# Altium PCB PCB2.PcbDoc
Units mm, origin at the board's own origin, x right, y up, seen from the top; angles counter-clockwise.
Board outline 88.72 x 68.2 mm, 2 copper layers (Top Layer, Bottom Layer); 41 components, 48 nets, 206 pads, 106 vias.
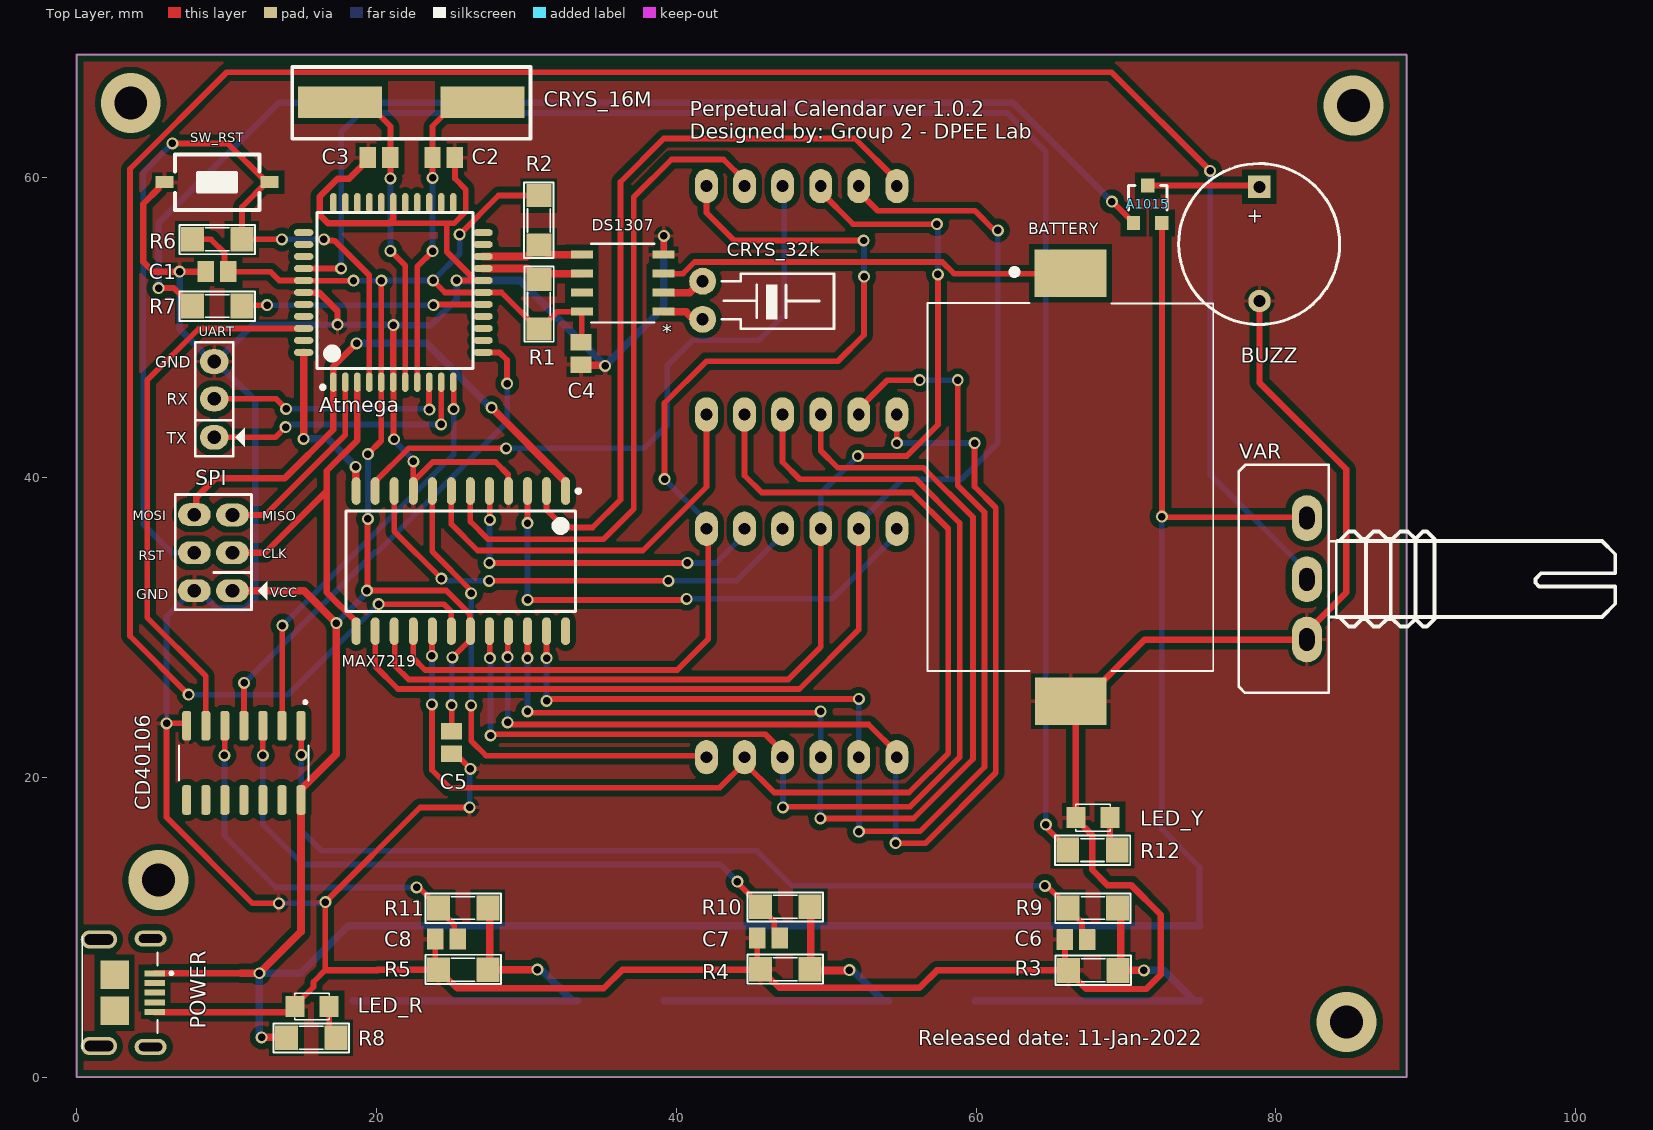
[diagram p0: Top Layer view]
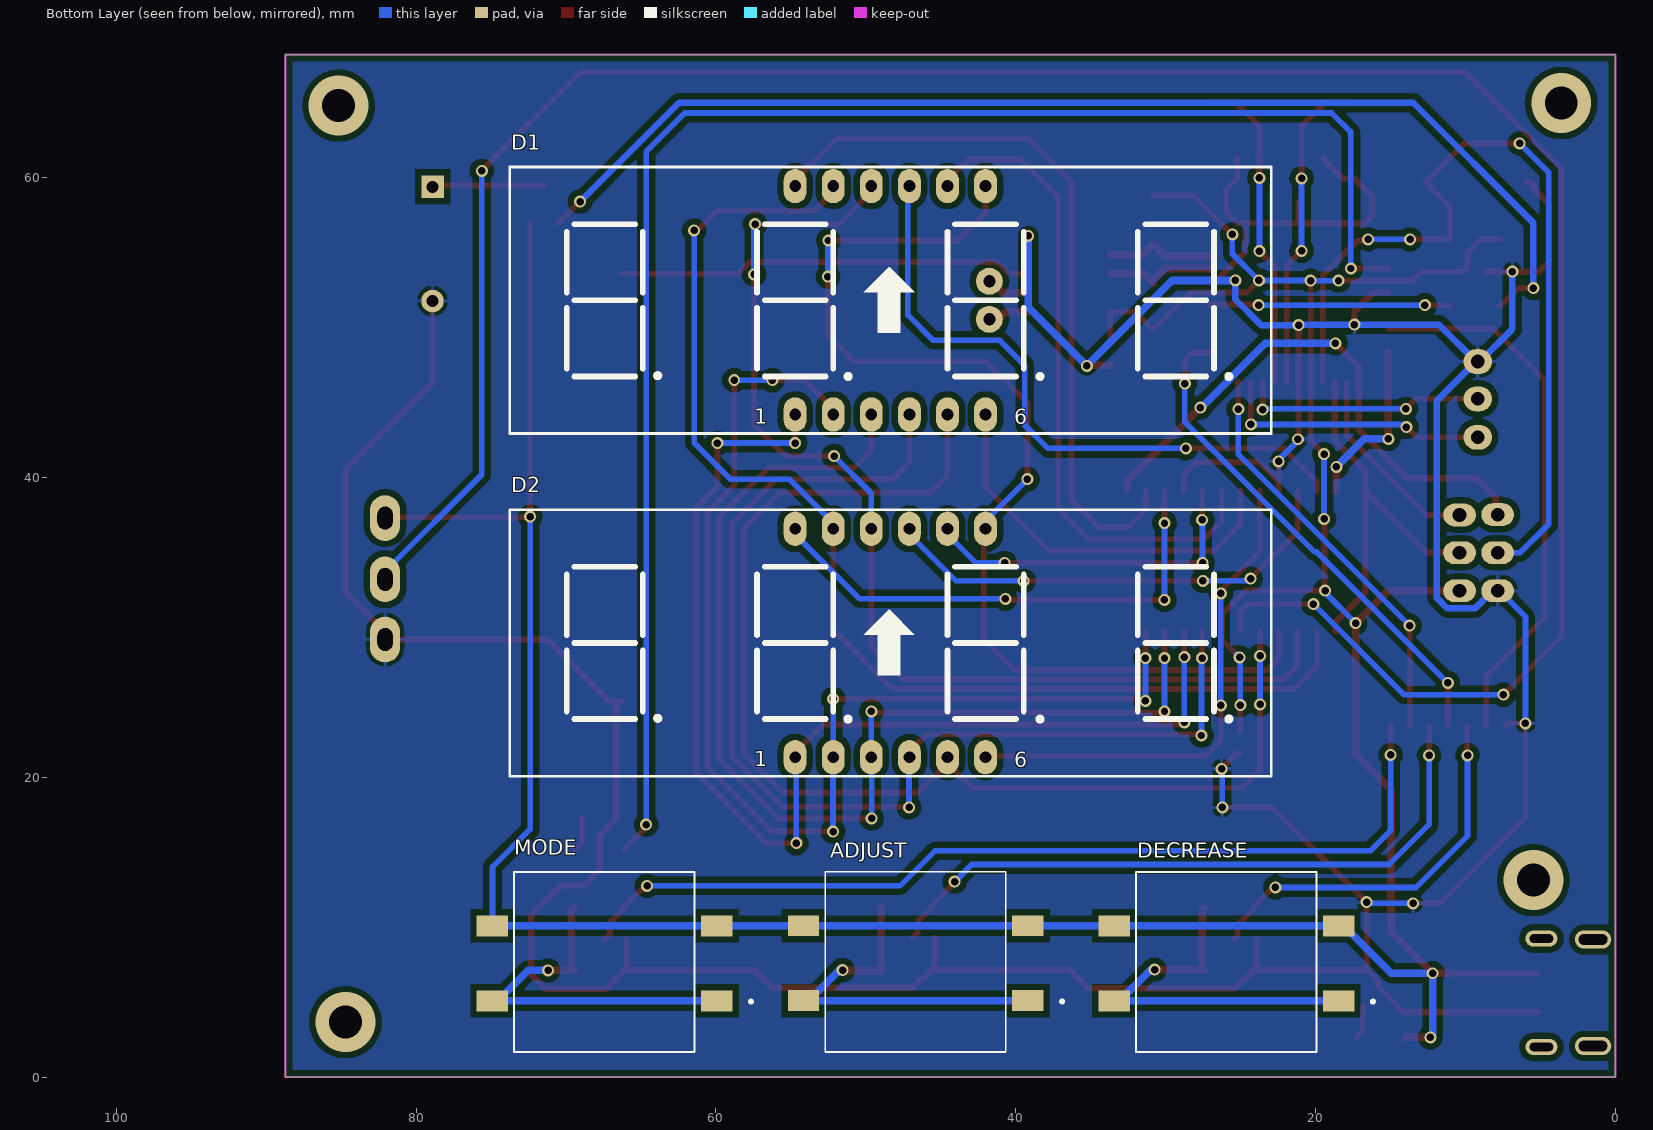
[diagram p1: Bottom Layer view, seen from below]

## Layer stack, top to bottom
Top Solder: solder mask 0.0102, Solder Resist, Dk 3.5
Top Layer: signal copper 0.0356
Dielectric 1: dielectric 0.32, FR-4, Dk 4.8
Bottom Layer: signal copper 0.0356
Bottom Solder: solder mask 0.0102, Solder Resist, Dk 3.5

## Board outline
0,0 0,68.199 88.722,68.199 88.722,0

## Design rules (kind name [scope] priority, off if disabled: settings)
Clearance Clearance_poly [InPolygon] p1: gap=0.406 ignorepadtopadclearanceinfootprint=FALSE
Clearance [All] p2: gap=0.2 ignorepadtopadclearanceinfootprint=FALSE
PolygonConnect [All] p1: connectstyle=Relief reliefconductorwidth=0.254 reliefentries=4 polygonreliefangle="90 Angle" airgapwidth=0.254
RoutingVias [All] p1: holewidth=0.5 width=0.8 viastyle="Through Hole" minholewidth=0.4 minwidth=0.8 maxholewidth=0.6 maxwidth=0.8
SolderMaskExpansion [All] p1: expansion=0.102 istentingtop=FALSE
Width [All] p1: maxlimit=1.016 minlimit=0.254 preferedwidth=0.508
30 further rules are at their usual default settings.

## Components (designator, comment, footprint, x,y, rotation, side; value= is the part's Value field where it differs from the comment)
A1015 "SA1015" SOT23-321 71.45,58.217 r0 top value=A1015 (schematic designator Q1)
ADJUST "Adjust" SW_1571527-1 46.66,7.468 r0 bottom (schematic designator SW2)
Atmega "ATmega32A-AU" TQFP44 21.12,52.336 r90 top (schematic designator U2)
BATTERY "796136-1" TE_796136-1 66.294,39.751 r270 top (schematic designator BAT)
BUZZ "Buzzer" SPEAKER 78.892,59.385 r270 top
C1 "0.1uF" C0805 9.373,53.721 r0 top value=33p
C2 "22pF" C0805 24.486,61.341 r0 top value=33p
C3 "22pF" C0805 20.18,61.341 r180 top value=33p
C4 "0.1uF" C0805 33.63,48.26 r90 top value=33p
C5 "0.1uF" C0805 25.019,22.327 r90 top value=33p
C6 "0.1uF" C0805 66.675,9.169 r0 top value=33p
C7 "0.1uF" C0805 46.152,9.271 r0 top value=33p
C8 "0.1uF" C0805 24.663,9.195 r0 top value=33p
CD40106 "CD40106BM" SOIC127P600X175-14N 11.151,20.955 r270 top
CRYS_16M "16MHz" ABLS2-8.000MHZ-D4Y-T 22.327,65.024 r0 top value=8MHz (schematic designator CRYS_16)
CRYS_32k "32.768Khz" XT32k 41.758,53.086 r0 top value=4Mhz (schematic designator CRYS_32)
D1 "Above" 7SEGQ 54.712,44.196 r180 bottom value="LED 7Q SEG"
D2 "Below" 7SEGQ 54.712,21.336 r180 bottom value="LED 7Q SEG"
DECREASE "Increase" SW_1571527-1 25.93,7.457 r0 bottom (schematic designator SW3)
DS1307 "ds1307zn+" 21-0041B_8_MXM 36.424,52.959 r180 top (schematic designator U3)
LED_R "LED SMD" SM-LED-0805-Red 16.84,4.699 r180 top
LED_Y "LED SMD" SM-LED-0805-Red 68.936,17.297 r180 top
MAX7219 "MAX7219ENG" SO24 25.629,34.417 r270 top (schematic designator U4)
MODE "Mode" SW_1571527-1 67.412,7.457 r0 bottom (schematic designator SW1)
POWER "2040002-1" TE_2040002-1 2.528,5.622 r270 top (schematic designator J)
R1 "4k7" SM-RES-1206 30.836,53.213 r270 top value="R1/4W - 1K"
R2 "4k7" SM-RES-1206 30.836,55.499 r90 top value="R1/4W - 1K"
R3 "1k" SM-RES-1206 66.167,7.112 r0 top value="R1/4W - 1K"
R4 "1k" SM-RES-1206 45.618,7.188 r0 top value="R1/4W - 1K"
R5 "1k" SM-RES-1206 24.13,7.163 r0 top value="R1/4W - 1K"
R6 "1k" SM-RES-1206 11.024,55.88 r180 top value="R1/4W - 1K"
R7 "1k" SM-RES-1206 11.024,51.435 r180 top value="R1/4W - 1K"
R8 "1K" SM-RES-1206 17.297,2.616 r180 top value="R1/4W - 1K"
R9 "10K" SM-RES-1206 69.444,11.278 r180 top value="R1/4W - 1K"
R10 "10K" SM-RES-1206 48.92,11.354 r180 top value="R1/4W - 1K"
R11 "10K" SM-RES-1206 27.432,11.278 r180 top value="R1/4W - 1K"
R12 "330" SM-RES-1206 69.418,15.138 r180 top value="R1/4W - 1K"
SPI "Connector 3x2" JP3x2 9.119,34.976 r90 top
SW_RST "RST" SW1-SMD 9.373,59.69 r0 top value="SW chip 2 pin"
UART "Jumper 3" JP3 9.169,45.212 r90 top value=J3
VAR "10K" VR-S1 82.067,33.223 r90 top value="Volume 50k"

## Footprints (in the part's own frame and the unit in brackets; to place one, negate y for a bottom-side part, rotate by r counter-clockwise, add the part's x,y. Pads: shape width x height; smd on the part's side, far side on the other; paste and mask are expansions set on the pad)
7SEGQ [mil] "DIP 12 Leads; Body 48 x 20 mm; Pitch 0.5 mm"
  oval 60x90 hole 31: 1(0,0) 2(100,0) 3(200,0) 4(300,0) 5(400,0) 6(500,0) 7(500,600) 8(400,600) 9(300,600) 10(200,600) 11(100,600) 12(0,600)
  silkscreen extent -750,-50 1250,650, body extent -720,-80 1260,668, height 565
21-0041B_8_MXM [mil]
  rect 57.5x21 smd paste+0 mask+0: 1(-107.25,75) 2(-107.25,25) 3(-107.25,-25) 4(-107.25,-75) 5(107.25,-75) 6(107.25,-25) 7(107.25,25) 8(107.25,75)
  silkscreen extent -84,-104 84,104, body extent -122,-99 122,99, height 69
ABLS2-8.000MHZ-D4Y-T [mm]
  rect 5.6x2.1 smd: 1(-4.75,0) 2(4.75,0)
  silkscreen extent -7.95,-2.44 7.95,2.36
C0805 [mm] "Chip Capacitor, Body 2.0x1.3mm, IPC High Density"
  rect 1.1x1.4 smd: 1(-0.75,0) 2(0.75,0)
  body extent -1.1,-0.72 1.1,0.72, height 1.4
JP3 [mil] "Jumper 3"
  oval 65x75 hole 36: 1(-100,0) 2(1,0) 3(99,0)
  silkscreen extent -150,-81 150,50, body extent -150,-60 150,55, height 355
JP3x2 [mil] "Connector 3x2"
  oval 60x86 hole 36: 1(-100,-50) 2(0,-50) 3(99,-50) 4(-100,50) 5(0,50) 6(100,50)
  silkscreen extent -150,-141 153,100, body extent -150,-100 150,100, height 335
SM-LED-0805-Red [mil]
  rect 50x55 smd: 1(0,0) 2(90,0)
  silkscreen extent 0,-35 90,35, body extent 5,-25 85,25, height 43
SM-RES-1206 [mil]
  rect 60x65 smd: 1(0,0) 2(130,0)
  silkscreen extent -34,-38 164,39, body extent 2,-31 128,32, height 40
SO24 [mm] "SOIC, 24-Leads, Body 15.30x7.50mm, Pitch 1.27mm, IPC Medium Density"
  oval 1.85x0.6 smd: 1(-4.675,6.985) 2(-4.675,5.715) 3(-4.675,4.445) 4(-4.675,3.175) 5(-4.675,1.905) 6(-4.675,0.635) 7(-4.675,-0.635) 8(-4.675,-1.905) 9(-4.675,-3.175) 10(-4.675,-4.445) 11(-4.675,-5.715) 12(-4.675,-6.985) 13(4.675,-6.985) 14(4.675,-5.715) 15(4.675,-4.445) 16(4.675,-3.175) 17(4.675,-1.905) 18(4.675,-0.635) 19(4.675,0.635) 20(4.675,1.905) 21(4.675,3.175) 22(4.675,4.445) 23(4.675,5.715) 24(4.675,6.985)
  silkscreen extent -4.8,-7.65 3.35,7.96, body extent -5.2,-7.83 5.2,7.57, height 2.6
SOIC127P600X175-14N [mm]
  rrect50% 1.97x0.6 smd: 1(-2.475,3.81) 2(-2.475,2.54) 3(-2.475,1.27) 4(-2.475,0) 5(-2.475,-1.27) 6(-2.475,-2.54) 7(-2.475,-3.81) 8(2.475,-3.81) 9(2.475,-2.54) 10(2.475,-1.27) 11(2.475,0) 12(2.475,1.27) 13(2.475,2.54) 14(2.475,3.81)
  silkscreen extent -4.15,-4.33 1.17,4.33
SOT23-321 [mm]
  rect 0.9x0.95 smd mask+0: 1(0.95,-1.25)
  rect 0.9x0.95 smd: 2(0,1.25) 3(-0.95,-1.25)
  silkscreen extent -1.3,-0.38 1.3,1.25, body extent -1.52,-1.23 1.48,1.27, height 1.06
SPEAKER [mm]
  rect 1.5x1.5 hole 0.8: 1(0,0)
  round 1.5 hole 0.8: 2(7.62,0.013)
  silkscreen extent -1.55,-5.38 9.18,5.36, body extent -2.22,-6 13.24,6, height 3.5
SW1-SMD [mm]
  rect 1.2x0.8 smd: 1(-3.5,0) 2(3.5,0)
  silkscreen extent -2.82,-1.85 2.82,1.85, body extent -3.05,-1.85 3.05,1.85, height 2.5
SW_1571527-1 [mm]
  rect 2.1x1.4 smd: 1(-7.468,2.377) 2(7.496,2.377) 3(-7.468,-2.623) 4(7.496,-2.623)
  silkscreen extent -9.85,-6.22 6.05,5.79
TE_796136-1 [mm]
  rect 3.15x4.78 smd: 1(-13.868,0) 2(14.681,0.025)
  silkscreen extent -14.16,-9.53 12.67,9.53
TE_2040002-1 [mm]
  rect 0.4x1.35 smd: 1(-1.3,2.675) 2(-0.65,2.675) 3(0,2.675) 4(0.65,2.675) 5(1.3,2.675)
  rect 1.9x1.9 smd: S4(-1.2,0) S5(1.2,0)
  oval 1.068x2.136 hole 0.56 slot 1.56 at 90 deg: SH1(-3.615,2.4) SH2(3.615,2.4)
  oval 1.218x2.436 hole 0.71 slot 1.91 at 90 deg: SH3(3.556,-1.041)
  oval 1.218x2.436 hole 0.71 slot 1.92 at 90 deg: SH4(-3.556,-1.041)
  silkscreen extent -3.77,-2.16 3.73,3.89
TQFP44 [mm] "TQFP, 44-Leads, Body 10X10mm, Pitch 0.80mm, IPC High Density"
  oval 1.3x0.45 smd: 1(-5.981,4) 2(-5.981,3.2) 3(-5.981,2.4) 4(-5.981,1.6) 5(-5.981,0.8) 6(-5.981,0) 7(-5.981,-0.8) 8(-5.981,-1.6) 9(-5.981,-2.4) 10(-5.981,-3.2) 11(-5.981,-4) 23(5.981,-4) 24(5.981,-3.2) 25(5.981,-2.4) 26(5.981,-1.6) 27(5.981,-0.8) 28(5.981,0) 29(5.981,0.8) 30(5.981,1.6) 31(5.981,2.4) 32(5.981,3.2) 33(5.981,4)
  oval 0.45x1.3 smd: 12(-4,-5.981) 13(-3.2,-5.981) 14(-2.4,-5.981) 15(-1.6,-5.981) 16(-0.8,-5.981) 17(0,-5.981) 18(0.8,-5.981) 19(1.6,-5.981) 20(2.4,-5.981) 21(3.2,-5.981) 22(4,-5.981) 34(4,5.981) 35(3.2,5.981) 36(2.4,5.981) 37(1.6,5.981) 38(0.8,5.981) 39(0,5.981) 40(-0.8,5.981) 41(-1.6,5.981) 42(-2.4,5.981) 43(-3.2,5.981) 44(-4,5.981)
  silkscreen extent -6.45,-5.33 5.33,5.07, body extent -5.99,-5.96 6.01,6.04, height 1.05
VR-S1 [mil]
  oval 120x78.74 hole 40 slot 60 at 0 deg: 1(-159,0) 2(-1,0) 3(160,0)
  silkscreen extent -299,-810 300,179, body extent -310,-818 310,188, height 840
XT32k [mm]
  round 1.8 hole 0.813: 1(0,0) 2(0,-2.54)
  silkscreen extent 1.27,-3.17 8.76,0.51, body extent -0.15,-2.42 8.2,-0.12, height 1.95

## Part data
A1015: library part 2SA1015, "PNP 600mW, ECB"
ADJUST DECREASE MODE: library part 1571527-1, "Switch Tactile OFF _ON_ Round Button Gull Wing 0.05A 12VDC 0.98N SMD Bulk", Package="SMD-6 Omron Electronics", Availability=Unavailable, EU_RoHS_Compliance=Compliant, MF="TE Connectivity", MP=1571527-1, Price=None, SnapEDA_Link=https://www.snapeda.com/parts/1571527-1/TE%20Connectivity/view-part/244428/?ref=snap, TE_purchase_URL=https://www.te.com/usa-en/product-1571527-1.html?te_bu=Cor&te_type=disp&te_campaign=seda_glo_cor-seda-global-disp-prtnr-fy19-seda-model-bom-cta_sma-317_1&elqCampaignId=32493
Atmega: "8/16-bit AVR XMEGA A4 Microcontroller, 1.6-3.6V, 32KB + 4KB Flash, 1KB EEPROM, 4KB SRAM, 44-pin TQFP, Industrial Grade (-40°C to 85°C), Pb-Free", Supplier Part Number 1=ATXMEGA32A4-AU-ND, ComponentLink1Description="Manufacturer Link", ComponentLink1URL=http://www.atmel.com/products/avr/default.asp?, ComponentLink2Description="ATxmega16A4/32A4/64A4/128A4 Datasheet", ComponentLink2URL=http://www.atmel.com/dyn/resources/prod_documents/doc8069.pdf, ComponentLink3Description="Atmel.com Home", ComponentLink3URL=http://www.atmel.com, DatasheetVersion="revN, Feb-2010", PackageDescription="44-Pin Plastic Thin Profile Quad Flat Pack, 10 x 10 x 1.0 mm Body, 0.8 mm Pitch (TQFP)", PackageReference=44A, PackageVersion="rev.B, Oct-2001", Published=1-Apr-2010, Publisher="Altium Limited", Supplier 1=Digi-Key, Supplier 2=Farnell, Supplier 3=Mouser, Supplier Part Number 2=1748557, Supplier Part Number 3=556-ATXMEGA32A4-AU
BATTERY: "BATTERY HOLDER; No. of Batteries:1; Terminal Type:Surface Mount; For Use With:CR2032 Batteries; Accessory Type:Battery Holder; Battery Size Code:2032", Package=None, Availability=Unavailable, EU_RoHS_Compliance=Compliant, MF="TE Connectivity", MP=796136-1, Number_of_Positions=2, Price=None, SnapEDA_Link=https://www.snapeda.com/parts/796136-1/TE%20Connectivity%20AMP%20Connectors/view-part/761452/?ref=snap, TE_purchase_URL=https://www.te.com/usa-en/product-796136-1.html?te_bu=Cor&te_type=disp&te_campaign=seda_glo_cor-seda-global-disp-prtnr-fy19-seda-model-bom-cta_sma-317_1&elqCampaignId=32493
C1 C2 C3 C4 C5 C6 C7 C8: library part CapSMD, "Capacitor", LatestRevisionDate=17-Jul-2002, LatestRevisionNote="Re-released for DXP Platform.", PackageReference=RAD-0.3, Published=8-Jun-2000, Publisher="Altium Limited"
CD40106: "CMOS Hex Schmitt Triggers 14-SOIC -55 to 125", Package="SOIC-14 Texas Instruments", Availability=Unavailable, DigiKey-Purchase-URL=https://snapeda.com/shop?store=DigiKey&id=321259, MF="Texas Instruments", Mouser-Purchase-URL=https://snapeda.com/shop?store=Mouser&id=321259, MP=CD40106BM, Price=None, SnapEDA_Link=https://www.snapeda.com/parts/CD40106BM/Texas%20Instruments/view-part/321259/?ref=snap, Texas_Instruments-Purchase-URL=https://snapeda.com/shop?store=Texas+Instruments&id=321259
CRYS_16M: library part ABLS2-8.000MHZ-D4Y-T, "Crystal, 8 MHz, SMD, 11.4mm x 4.7mm, 30 ppm, 18 pF, 30 ppm, ABLS2 Series", Manufacturer=ABRACON, Component Type=Crystal, Manufacturer Part No=ABLS2-8.000MHZ-D4Y-T
CRYS_32k: library part XT2, "Crystal, 32.768 KHz, -40 to 85 degC, 3.2 x 1.5 x 0.9 mm SMD"
D1 D2: library part LED7Q, "Four 7 Seg Dipslay"
DS1307: "No Description Available", Mfr_Name="Maxim Integrated Products", Copyright="Copyright (C) 2021 Ultra Librarian. All rights reserved.", Manufacturer_Part_Number=ds1307zn+, RefDes=RefDes, Type=DEV
LED_R LED_Y: library part LED-SMD-0805
MAX7219: "Serially Interfaced, 8-Digit LED Display Driver", Code_JEDEC=MS-001-AF, ComponentLink1Description="Manufacturer Link", ComponentLink1URL=http://www.maxim-ic.com/, ComponentLink2Description=Datasheet, ComponentLink2URL=http://pdfserv.maxim-ic.com/en/ds/MAX7219-MAX7221.pdf, DatasheetVersion=Jul-1997, LatestRevisionDate=29-May-2009, LatestRevisionNote="Component Body Added.", PackageDescription="DIP, 24-Pin, Row Spacing 7.62 mm, Pitch 2.54 mm", PackageReference=NG24A, PackageVersion=1997, Published=16-Jan-2001, Publisher="Altium Limited"
POWER: "Conn Micro USB 2.0 Type B RCP 5 POS 0.65mm Solder RA SMD 5 Terminal 1 Port T/R", Package=None, Availability=Unavailable, Centerline_Pitch=".65 mm[.025 in]", MF="TE Connectivity", MP=2040002-1, Number_of_Positions=5, Price=None, Product_Type=Connector, SnapEDA_Link=https://www.snapeda.com/parts/2040002-1/TE%20Connectivity%20AMP%20Connectors/view-part/782025/?ref=snap, TE_purchase_URL=https://www.te.com/usa-en/product-2040002-1.html?te_bu=Cor&te_type=disp&te_campaign=seda_glo_cor-seda-global-disp-prtnr-fy19-seda-model-bom-cta_sma-317_1&elqCampaignId=32493
R1 R2 R3 R4 R5 R6 R9 R10 R11: library part R, "Resistor 1/4W"
R7 R8 R12: library part R, "Resistor for buzzer"
SPI: library part JP3x2
SW_RST: library part SW2, "Switch button 2 pin"
UART: library part JP3
VAR: library part VR-S, "Var Resistor"

## Via types
v1: diameter 0.8, hole 0.5, Top Layer to Bottom Layer, 56 vias
v2: diameter 0.8/0.8 (per signal layer), hole 0.5, Top Layer to Bottom Layer, 46 vias
v3: diameter 4/4 (per signal layer), hole 2.2, Top Layer to Bottom Layer, 4 vias

## Nets (pads, with @x,y where several pads share a name; then routed paths per layer and width w, separated by ;. In a path a pad name is that pad's centre, name@x,y a point inside that pad or via, vN(x,y) a via of type N, cw(c..) or ccw(c..) an arc to the next point about the centre after c; other vN are vias at no path point)
Adjust: Atmega.12 CD40106.4 | length 33.6
  Top Layer w0.381: CD40106.4 11.163,23.443 11.163,26.279 v1(11.176,26.292) ; Atmega.12 28.194,48.336 28.702,47.828 28.702,46.279 v1(28.721,46.26)
  Bottom Layer w0.381: v1(11.176,26.292) 19.917,35.033 20.06,35.033 28.721,43.694 v1(28.721,46.26)
Buzzer: Atmega.16 R7.1 | length 16.1
  Top Layer w0.381: R7.1 11.074,51.486 v1(12.7,51.486) ; v1(23.8,51.486) 23.85,51.536 Atmega.16@27.1,51.536
  Bottom Layer w0.381: v1(12.7,51.486) v1(23.8,51.486)
CLK: Atmega.3 MAX7219.13 SPI.2 | length 26.3
  Top Layer w0.432: SPI.2 12.573,34.976 16.688,39.091 ; MAX7219.13 18.644,30.367 16.688,32.323 16.688,39.091 ; Atmega.3 18.72,42.469 16.688,40.437 16.688,40.157 16.688,39.091
Dig0: D1.12 MAX7219.2 | length 49.8
  Top Layer w0.381: MAX7219.2 31.344,37.846 32.537,36.652 34.417,36.652 36.271,38.506 36.271,59.715 39.167,62.611 51.918,62.611 54.712,59.817 D1.12
Dig1: D1.9 MAX7219.11 | length 43.5
  Top Layer w0.381: MAX7219.11 19.914,39.717 22.132,41.935 v1(28.651,41.935)
  Bottom Layer w0.381: v1(28.651,41.935) 37.846,41.935 39.395,43.485 39.395,47.473 41.072,49.149 45.517,49.149 47.193,50.825 47.193,59.334 D1.9
Dig2: D1.8 MAX7219.6 | length 44.5
  Top Layer w0.381: MAX7219.6 26.264,37.059 27.457,35.865 35.128,35.865 37.163,37.9 37.163,58.703 39.675,61.214 43.155,61.214 44.552,59.817 D1.8
Dig3: D1.6 MAX7219.7 | length 26.5
  Top Layer w0.381: MAX7219.7 24.994,36.881 26.746,35.128 37.77,35.128 42.012,39.37 D1.6
Dig4: D2.12 MAX7219.3 | length 34.1
  Top Layer w0.381: v2(30.074,31.826) 40.615,31.826 v2(40.691,31.902) ; v2(30.074,36.957) MAX7219.3
  Bottom Layer w0.381: v2(30.074,31.826) v2(30.074,36.957) ; v2(40.691,31.902) 50.419,31.902 54.712,36.195 D2.12
Dig5: D2.9 MAX7219.10 | length 31.7
  Top Layer w0.381: MAX7219.10 21.184,36.398 v2(24.333,33.249) ; v2(27.508,33.096) v2(39.472,33.096) ; D2.9@47.073,36.557 D2.9
  Bottom Layer w0.381: v2(24.333,33.249) 24.484,33.098 27.507,33.098 v2(27.508,33.096) ; v2(39.472,33.096) 43.993,33.096 47.092,36.195 D2.9
Dig6: D2.8 MAX7219.5 | length 23
  Top Layer w0.381: v2(27.534,34.29) v2(40.742,34.29) ; MAX7219.5 27.556,39.07 v2(27.556,37.163)
  Bottom Layer w0.381: v2(27.534,34.29) 27.534,37.141 v2(27.556,37.163) ; v2(40.742,34.29) 42.647,34.29 44.552,36.195 D2.8
Dig7: D2.6 MAX7219.8 | length 33.9
  Top Layer w0.381: MAX7219.8 23.724,35.052 26.314,32.461 v2(26.314,32.264) ; v2(26.314,24.79) 26.314,22.428 27.304,21.439 41.909,21.439 D2.6
  Bottom Layer w0.381: v2(26.314,24.79) v2(26.314,32.264)
DIN: Atmega.1 MAX7219.1 SPI.6 | length 37
  Top Layer w0.381: v1@27.686,44.645 v1(27.686,44.653) ; MAX7219.1@32.542,39.789 32.542,39.164 MAX7219.1
  Top Layer w0.432: SPI.6 7.989,37.657 7.989,38.673 9.271,39.954 13.894,39.954 17.12,43.18 Atmega.1 17.12,47.396 v1(18.669,48.946)
  Top Layer w0.508: v1@27.686,44.645 MAX7219.1@32.542,39.789
  Bottom Layer w0.508: v1(18.669,48.946) 23.343,48.946 27.635,44.653 v1(27.686,44.653)
GND: Atmega.6 Atmega.18 Atmega.28 Atmega.39 BATTERY.2 BUZZ.2 C1.1 C2.2 C3.2 C4.1 C5.1 C6.1 C7.1 C8.1 CD40106.7 DS1307.4 LED_R.2 LED_Y.2 MAX7219.4 MAX7219.9 POWER.5 R3.1 R4.1 R5.1 SPI.4 SW_RST.1 UART.3 VAR.1 | length 328.8
  Top Layer w0.381: CD40106.7 7.174,23.597 v1(5.994,23.597) 5.994,17.323 11.735,11.582 v1(13.487,11.582) ; LED_R.2 14.554,4.763 15.792,6.001 15.792,6.344 16.586,7.137 v1(16.586,11.659) 22.911,17.983 v2(26.213,17.983) ; 20.867,56.947 24.689,56.947 ; Atmega.6 21.133,46.342 21.133,42.596 v1(21.184,42.545) ; MAX7219.9 MAX7219.9@22.454,39.717 ; v1(22.454,41.072) MAX7219.9@22.454,39.717 ; C8.1 23.913,7.379 R5.1 ; C5.1 25.25,21.577 v1(26.265,20.562) ; C2.2 25.236,59.931 25.953,59.213 25.953,57.729 25.171,56.947 24.689,56.947 ; v1@25.333,53.136 26.421,53.136 ; 26.421,53.32 24.689,55.052 24.689,56.947 ; MAX7219.4 28.789,39.107 28.789,40.172 27.94,41.021 23.758,41.021 MAX7219.9@22.454,39.717 ; C7.1 45.402,7.405 R4.1 ; C6.1 65.925,7.354 R3.1
  Top Layer w0.432: POWER.5 14.177,4.322 LED_R.2 ; SW_RST.1 5.673,59.69 5.488,59.506 5.488,59.306 4.445,58.262 4.445,54.381 5.105,53.721 v1(6.864,53.721) C1.1 ; Atmega.39 15.142,52.333 16.171,52.333 17.399,51.105 v1(17.399,50.19) ; 16.586,7.137 20.072,7.137 20.098,7.163 R5.1 24.13,7.099 24.676,6.553 24.74,6.553 25.371,5.921 35.164,5.921 36.406,7.163 45.593,7.163 R4.1 45.618,7.125 46.165,6.579 46.228,6.579 46.86,5.947 56.221,5.947 57.386,7.112 R3.1 66.167,7.049 67.345,5.871 71.352,5.871 72.314,6.833 72.314,10.82 70.333,12.802 68.758,12.802 67.742,13.818 67.742,16.142 66.65,17.234 LED_Y.2 66.65,24.74 BATTERY.2 67.134,25.07 71.249,29.185 VAR.1 82.067,29.709 84.684,32.325 84.684,40.54 78.905,46.318 BUZZ.2 ; C3.2 19.43,61.191 18.171,59.932 17.403,59.932 16.205,58.734 16.205,57.506 16.764,56.947 20.867,56.947 21.12,57.2 Atmega.28 ; Atmega.6 21.123,46.358 21.123,50.159 v1(21.129,50.165) ; C4.1 C4.1@33.661,47.479 ; v1@35.224,47.479 v1(35.255,47.447) ; DS1307.4 39.167,54.883 v1(39.167,56.109)
  Top Layer w0.508: C4.1@33.661,47.479 v1@35.224,47.479
  Bottom Layer w0.381: v1(5.994,23.597) 5.994,30.709 7.722,32.436 SPI.4 ; v1(13.487,11.582) 16.51,11.582 v1(16.586,11.659) ; v1(21.184,42.545) 21.184,42.443 22.454,41.173 v1(22.454,41.072) ; v2(26.213,17.983) 26.213,20.51 v1(26.265,20.562)
  Bottom Layer w0.432: v1(6.864,53.721) 6.864,49.905 9.042,47.727 UART.3 UART.3@9.296,47.727 ; SPI.4 8.179,32.436 9.357,31.258 11.207,31.258 11.897,31.948 11.897,45.126 UART.3@9.296,47.727 ; v1@25.324,53.127 25.349,53.101 25.349,51.881 23.633,50.165 v1(21.129,50.165) 21.116,50.178 17.412,50.178 v1(17.399,50.19) 11.76,50.19 UART.3@9.296,47.727
  Bottom Layer w0.508: v1@25.324,53.127 25.334,53.137 v1(25.349,53.137) 29.566,53.137 v1(35.255,47.447) 39.167,51.359 v1(39.167,56.109)
i_Adjust: C7.2 CD40106.3 R10.2 | length 44.7
  Top Layer w0.381: v1(12.421,21.463) CD40106.3 ; v1(44.069,13.03) 44.069,12.967 45.618,11.417 R10.2 45.618,11.29 46.542,10.366 46.542,9.631 C7.2
  Bottom Layer w0.381: v1(12.421,21.463) 12.421,16.84 15.088,14.173 42.926,14.173 v1(44.069,13.03)
i_Increase: C8.2 CD40106.5 R11.2 | length 26.3
  Top Layer w0.381: v1(9.855,21.463) 9.868,21.476 9.868,23.417 CD40106.5 ; v1(22.677,12.645) 22.826,12.645 24.13,11.341 R11.2 24.13,11.214 25.189,10.155 25.189,9.603 25.189,9.419 C8.2
  Bottom Layer w0.381: v1(9.855,21.463) 9.855,16.078 13.288,12.645 v1(22.677,12.645)
i_Mode: C6.2 CD40106.1 R9.2 | length 63
  Top Layer w0.381: CD40106.1 14.973,23.417 14.973,21.501 v1(14.986,21.488) ; v1(64.592,12.751) 64.732,12.751 66.142,11.341 R9.2 66.142,11.214 67.065,10.29 67.065,9.529 C6.2
  Bottom Layer w0.381: v1(14.986,21.488) 14.986,16.451 16.35,15.088 45.382,15.088 47.719,12.751 v1(64.592,12.751)
Incr: Atmega.42 CD40106.6 | length 36.5
  Top Layer w0.381: CD40106.6 8.611,26.746 4.699,30.658 4.699,46.482 8.153,49.936 Atmega.42
LOAD: Atmega.44 MAX7219.12 | length 11.6
  Top Layer w0.508: v1(15.138,42.57) Atmega.44 ; v1(18.6,40.709) 18.626,40.683 18.626,39.11 MAX7219.12
  Bottom Layer w0.508: v1(15.138,42.57) 16.739,42.57 v1(18.6,40.709)
MISO: Atmega.2 SPI.3 | length 13.3
  Top Layer w0.381: SPI.3 12.573,37.49 17.92,42.837 Atmega.2
Mode: Atmega.11 CD40106.2 | length 27.7
  Top Layer w0.381: CD40106.2 13.71,23.449 13.71,30.092 v1(13.729,30.112) ; Atmega.11 25.146,46.329 v2(25.146,44.552)
  Bottom Layer w0.381: v1(13.729,30.112) 25.146,41.529 v2(25.146,44.552)
NetBAT_1: BATTERY.1 DS1307.3 | length 27.8
  Top Layer w0.381: DS1307.3 40.441,53.594 41.223,54.377 57.739,54.377 58.522,53.594 66.269,53.594 BATTERY.1
NetBUZZ_1: A1015.2 BUZZ.1 | length 7.5
  Top Layer w0.381: A1015.2 78.811,59.467 BUZZ.1
NetCRYS_32_1: CRYS_32k.1 DS1307.2 | length 2.8
  Top Layer w0.508: DS1307.2 40.9,52.324 41.408,52.832 CRYS_32k.1@41.758,52.832
NetCRYS_32_2: CRYS_32k.2 DS1307.1 | length 2.9
  Top Layer w0.508: DS1307.1 40.646,51.054 41.408,50.292 CRYS_32k.2@41.758,50.292
NetLED_R_1: LED_R.1 R8.1 | length 2.3
  Top Layer w0.381: LED_R.1 16.84,3.073 R8.1
NetLED_Y_1: LED_Y.1 R12.1 | length 2.4
  Top Layer w0.381: LED_Y.1 68.936,15.621 R12.1
NetQ1_3: A1015.3 R7.2 | length 78.8
  Top Layer w0.381: v1(5.461,52.629) 6.477,52.629 7.696,51.41 R7.2 ; v1(69.063,58.395) 69.097,58.395 70.5,56.992 A1015.3
  Bottom Layer w0.432: v1(5.461,52.629) 5.461,56.972 13.487,64.999 62.459,64.999 v1(69.063,58.395)
NetR3_2: MODE.1 MODE.2 R3.2 R9.1 | length 25.2
  Top Layer w0.508: R9.1 69.648,11.073 69.648,7.291 R3.2@69.52,7.163 ; R3.2 R3.2@69.52,7.163 ; v1(71.196,7.112) 69.571,7.112 R3.2@69.52,7.163
  Bottom Layer w0.508: MODE.1 MODE.2@74.558,5.08 ; v1(71.196,7.112) 72.526,7.112 MODE.2@74.558,5.08 ; MODE.2 MODE.2@74.558,5.08
NetR4_2: ADJUST.1 ADJUST.2 R4.2 R10.1 | length 25
  Top Layer w0.508: R10.1 48.973,11.302 48.973,7.24 R4.2 49.002,7.107 51.523,7.107 v1(51.553,7.137)
  Bottom Layer w0.508: ADJUST.1 ADJUST.2@53.806,5.091 ; v1(51.553,7.137) 51.76,7.137 ADJUST.2@53.806,5.091 ; ADJUST.2 ADJUST.2@53.806,5.091
NetR5_2: DECREASE.1 DECREASE.2 R5.2 R11.1 | length 25.7
  Top Layer w0.508: R11.1 27.56,11.149 27.56,7.291 R5.2 v1(30.734,7.163)
  Bottom Layer w0.508: DECREASE.1 DECREASE.2@33.076,5.08 ; v1(30.734,7.163) 30.994,7.163 DECREASE.2@33.076,5.08 ; DECREASE.2 DECREASE.2@33.076,5.08
NetU4_18: MAX7219.18 VAR.2 | length 165.6
  Top Layer w0.381: v1(7.468,25.502) 3.556,29.413 3.556,60.579 10.007,67.031 69.037,67.031 v1(75.616,60.452) ; v1(20.142,31.547) 24.486,31.547 24.994,31.039 MAX7219.18
  Bottom Layer w0.381: v1(7.468,25.502) 14.097,25.502 v1(20.142,31.547) ; v1(75.616,60.452) 75.616,40.173 82.067,33.722 VAR.2
RST: Atmega.4 R6.1 SPI.5 SW_RST.2 | length 58.9
  Top Layer w0.381: v1(6.375,62.281) 10.082,62.281 12.673,59.69 11.024,58.041 R6.1 v2(13.691,55.88) ; v2(16.485,55.88) 16.565,55.8 17.053,55.8 17.072,55.782 17.218,55.782 19.52,53.48 Atmega.4
  Bottom Layer w0.381: v1(6.375,62.281) 4.445,60.35 4.445,36.881 6.35,34.976 SPI.5 ; v2(13.691,55.88) v2(16.485,55.88)
RXD: Atmega.9 UART.2 | length 16.5
  Top Layer w0.381: UART.2 13.31,45.237 v1(13.97,44.577) ; Atmega.9 23.507,46.343 23.507,44.539 v1(23.52,44.526)
  Bottom Layer w0.381: v1(13.97,44.577) 23.47,44.577 v1(23.52,44.526)
SCL: Atmega.19 DS1307.6 R1.1 | length 7.4
  Top Layer w0.508: Atmega.19 30.049,53.936 30.836,53.15 R1.1@30.836,53.023 ; R1.1@30.836,52.959 R1.1@30.836,53.023 ; DS1307.6 31.407,53.594 R1.1@30.836,53.023
SDA: Atmega.20 DS1307.5 R2.1 | length 7.2
  Top Layer w0.508: Atmega.20 30.009,54.736 30.772,55.499 R2.1 30.899,55.499 31.534,54.864 DS1307.5
segA: D1.11 D2.11 MAX7219.14 | length 80.4
  Top Layer w0.381: MAX7219.14 19.914,27.407 21.438,25.883 48.209,25.883 52.172,29.845 D2.11 ; D1.11 52.172,59.055 53.442,57.785 59.919,57.785 61.227,56.477 v2(61.45,56.477)
  Bottom Layer w0.381: D2.11 52.172,36.957 55.093,39.878 59.03,39.878 61.45,42.298 v2(61.45,56.477)
segB: D1.7 D2.7 MAX7219.16 | length 74.1
  Top Layer w0.381: MAX7219.16 22.454,27.94 23.244,27.149 40.066,27.149 42.126,29.21 42.126,36.461 D2.7 ; v2(39.218,39.878) 39.218,44.958 42.012,47.752 50.775,47.752 52.527,49.505 v2(52.527,53.391) ; D1.7 42.012,57.658 43.866,55.804 v2(52.502,55.804)
  Bottom Layer w0.381: v2(39.218,39.878) 42.012,37.084 D2.7 ; v2(52.502,55.804) 52.527,55.778 v2(52.527,53.391)
segC: D1.4 D2.4 MAX7219.20 | length 76.2
  Top Layer w0.381: MAX7219.20 27.559,29.717 v2(27.559,27.94) ; v1(27.611,22.782) 27.725,22.782 27.812,22.87 45.939,22.87 47.092,21.717 D2.4 ; D1.4 47.092,41.021 48.235,39.878 55.982,39.878 58.903,36.957 58.903,21.336 55.604,18.037 47.171,18.037 v2(47.117,17.983)
  Bottom Layer w0.381: v2(27.559,27.94) 27.611,27.888 v1(27.611,22.782) ; D2.4 47.117,21.311 v2(47.117,17.983)
segD: D1.2 D2.2 MAX7219.23 | length 78.9
  Top Layer w0.381: v2(31.344,25.092) 31.457,25.092 31.587,25.222 v2(52.172,25.222) ; v2(31.344,27.94) MAX7219.23 ; D1.2 52.172,44.577 54.077,46.482 v2(56.236,46.482) ; v2(52.187,16.373) 52.2,16.386 56.264,16.386 60.554,20.676 60.554,37.68 58.776,39.458 v2(58.776,46.482)
  Bottom Layer w0.381: v2(31.344,25.092) v2(31.344,27.94) ; v2(52.172,25.222) D2.2 52.187,21.321 v2(52.187,16.373) ; v2(56.236,46.482) v2(58.776,46.482)
segDP: D1.3 D2.3 MAX7219.22 | length 74.5
  Top Layer w0.381: v2(30.074,24.384) 30.154,24.304 31.014,24.304 31.016,24.302 49.436,24.302 49.518,24.384 v2(49.632,24.384) ; v2(30.074,27.94) MAX7219.22 ; v2(49.606,17.247) 55.829,17.247 59.792,21.209 59.792,37.338 56.493,40.637 50.778,40.637 49.632,41.783 D1.3
  Bottom Layer w0.381: v2(30.074,24.384) v2(30.074,27.94) ; v2(49.606,17.247) 49.606,21.311 D2.3 v2(49.632,24.384)
segE: D1.1 D2.1 MAX7219.21 | length 77.3
  Top Layer w0.381: v2(28.753,23.66) 28.892,23.52 52.829,23.52 54.712,21.638 D2.1 ; v2(28.753,28.016) 28.753,29.691 MAX7219.21 ; v2(54.635,15.596) 56.617,15.596 61.316,20.295 61.316,37.973 59.893,39.395 v2(59.893,42.291) ; v2(54.712,42.291) D1.1
  Bottom Layer w0.381: v2(28.753,23.66) v2(28.753,28.016) ; v2(54.635,15.596) 54.635,21.26 D2.1 ; v2(54.712,42.291) v2(59.893,42.291)
segF: D1.10 D2.10 MAX7219.15 | length 74.4
  Top Layer w0.381: MAX7219.15 21.211,29.714 21.211,27.455 22.149,26.518 47.462,26.518 49.632,28.687 D2.10 ; D1.10 49.632,59.055 51.791,56.896 v2(57.379,56.896) ; v2(52.121,41.427) 55.372,41.427 57.455,43.51 v2(57.455,53.543)
  Bottom Layer w0.381: D2.10 49.632,38.938 v2(52.121,41.427) ; v2(57.379,56.896) 57.455,56.82 v2(57.455,53.543)
segG: D1.5 D2.5 MAX7219.17 | length 81.3
  Top Layer w0.381: v2(23.698,24.867) 23.698,20.472 24.867,19.304 42.901,19.304 D2.5@44.552,20.955 ; v2(23.698,28.092) 23.698,29.717 MAX7219.17 ; D2.5 D2.5@44.552,20.955 ; D1.5 44.552,40.132 45.695,38.989 55.728,38.989 58.141,36.576 58.141,21.59 55.524,18.974 46.533,18.974 D2.5@44.552,20.955
  Bottom Layer w0.381: v2(23.698,24.867) v2(23.698,28.092)
TXD: Atmega.10 UART.1 | length 18.3
  Top Layer w0.381: UART.1 13.246,42.672 v1(13.935,43.361) ; v1(24.308,43.536) 24.328,43.556 24.328,46.347 Atmega.10
  Bottom Layer w0.381: v1(13.935,43.361) 14.11,43.536 v1(24.308,43.536)
User_LED: Atmega.37 R12.2 | length 107.4
  Top Layer w0.381: Atmega.37 v1(17.639,53.936) ; v2(64.647,16.833) 64.647,16.671 66.116,15.202 R12.2
  Bottom Layer w0.381: v1(17.639,53.936) 17.639,63.029 18.923,64.313 62.078,64.313 64.647,61.743 v2(64.647,16.833)
VCC_5V: A1015.1 ADJUST.3 ADJUST.4 Atmega.5 Atmega.17 Atmega.38 C1.2 C4.2 C5.2 CD40106.14 DECREASE.3 DECREASE.4 DS1307.8 MAX7219.19 MODE.3 MODE.4 POWER.1 R1.2 R2.2 R6.2 R8.2 SPI.1 VAR.3 | length 250
  Top Layer w0.381: R6.2 8.966,55.88 9.854,54.993 9.854,53.99 C1.2 12.929,53.721 13.514,53.136 Atmega.38 15.152,53.123 v1(18.466,53.123) ; v1(19.431,37.236) 19.393,37.198 19.393,32.487 v1(19.355,32.448) 24.651,32.448 26.222,30.878 26.222,29.784 MAX7219.19 26.264,29.176 25.074,27.987 v1(25.066,27.987) ; v1(19.431,41.554) 20.32,42.443 Atmega.5 20.32,53.086 v1(20.32,53.123) ; v1(23.774,53.137) 24.575,52.336 Atmega.17 28.347,52.336 30.772,49.911 R1.2 30.899,49.911 32.042,51.054 DS1307.8 33.699,49.08 C4.2 ; C5.2 v1(25.019,24.816) ; v1(25.552,56.21) 28.143,58.801 R2.2 ; A1015.1 72.4,37.399 v1(72.39,37.389) 72.441,37.338 82.017,37.338 VAR.3
  Top Layer w0.457: POWER.1 10.96,6.922
  Top Layer w0.508: SPI.1 15.164,32.436 v1(17.323,30.277) 17.323,21.527 14.961,19.165 14.961,9.703 v1(12.179,6.922) 10.96,6.922 ; v1(12.344,2.642) 13.97,2.642 R8.2
  Bottom Layer w0.381: v1(17.323,30.277) 19.355,32.309 v1(19.355,32.448) ; v1(18.466,53.123) v1(20.32,53.123) 20.327,53.13 23.767,53.13 v1(23.774,53.137) 25.552,54.915 v1(25.552,56.21) ; v1(19.431,37.236) v1(19.431,41.554) ; v1(25.019,24.816) 25.019,27.94 v1(25.066,27.987) 25.066,27.995 v1@25.273,28.202 ; v1(72.39,37.389) 72.39,16.535 74.908,14.017 MODE.4
  Bottom Layer w0.508: v1(12.344,2.642) 12.179,2.807 v1(12.179,6.922) 14.954,6.922 18.112,10.08 DECREASE.3 DECREASE.4 33.432,10.085 39.187,10.085 ADJUST.3 ADJUST.4 54.162,10.085 59.939,10.085 MODE.3 MODE.4
XTAL1: Atmega.8 C2.1 CRYS_16M.2 | length 21.5
  Top Layer w0.381: Atmega.8 22.72,54.063 v2(23.749,55.093) ; C2.1@23.724,61.329 23.742,61.31 23.742,59.988 v2(23.738,59.983) ; C2.1 23.736,63.433 25.327,65.024 CRYS_16M.2
  Top Layer w0.508: C2.1@23.724,61.329 C2.1
  Bottom Layer w0.381: v2(23.738,59.983) 23.738,55.104 v2(23.749,55.093)
XTAL2: Atmega.7 C3.1 CRYS_16M.1 | length 21.5
  Top Layer w0.381: CRYS_16M.1 19.327,65.024 20.93,63.421 v2(20.93,59.944) ; v2(20.93,55.118) 21.92,54.128 Atmega.7
  Bottom Layer w0.381: v2(20.93,55.118) v2(20.93,59.944)
pads on no net: Atmega.13 Atmega.14 Atmega.15 Atmega.21 Atmega.22 Atmega.23 Atmega.24 Atmega.25 Atmega.26 Atmega.27 Atmega.29 Atmega.30 Atmega.31 Atmega.32 Atmega.33 Atmega.34 Atmega.35 Atmega.36 Atmega.40 Atmega.41 Atmega.43 CD40106.8 CD40106.9 CD40106.10 CD40106.11 CD40106.12 CD40106.13 DS1307.7 MAX7219.24 POWER.2 POWER.3 POWER.4 POWER.S4 POWER.S5 POWER.SH1 POWER.SH2 POWER.SH3 POWER.SH4
copper on no net:
  other v3: 84.709,3.658 5.461,13.132 85.166,64.795 3.607,64.973

## Polygon pours and split planes (outlines as drawn)
GND on Bottom Layer "GND_L02_P003" (solid, pour order 3): 0,0 0,68.199 88.722,68.199 88.722,0
GND on Top Layer "GND_L01_P000" (solid, pour order 0): 0,0 0,68.199 88.722,68.199 88.722,0

## Keep-outs
Keep-Out Layer:
  the board outline again, w0.127

## Silkscreen, mask and mechanical layers (free items; w line width, h text height)
Top Overlay:
  text "Perpetual Calendar ver 1.0.2 / Designed by: Group 2 - DPEE Lab" at 40.894,62.586 h1
  text "GND" at 5.229,47.317 h0.76
  text "RX" at 5.991,44.853 h0.76
  text "TX" at 5.991,42.237 h0.76
  text "MOSI" at 3.756,37.132 h0.64
  text "MISO" at 12.367,37.106 h0.64
  text "CLK" at 12.392,34.592 h0.64
  text "RST" at 4.137,34.465 h0.64
  text "VCC" at 12.9,32.001 h0.64
  text "GND" at 3.985,31.874 h0.69
  text "Released date: 11-Jan-2022" at 56.131,2.13 h1

## Text inside footprints (layer, text, board x,y; h text height)
BATTERY: Mechanical 13 "-" at 65.634,28.956 h1 r270; Mechanical 13 "+" at 65.735,50.673 h1 r270
BUZZ: Top Overlay "+" at 78.181,57.975 h1 r270
D1: Bottom Overlay "1" at 57.455,43.586 h1; Bottom Overlay "6" at 40.107,43.536 h1
D2: Bottom Overlay "6" at 40.107,20.676 h1; Bottom Overlay "1" at 57.455,20.726 h1
DS1307: Mechanical 13 "*" at 38.354,51.803 h1 r180; Top Overlay "*" at 39.719,50.648 h1 r180
POWER: Mechanical 13 "PCB EDGE" at 1.091,1.593 h0.41 r270